# EAGLE board half-moon-earring (EAGLE 9.5.2)
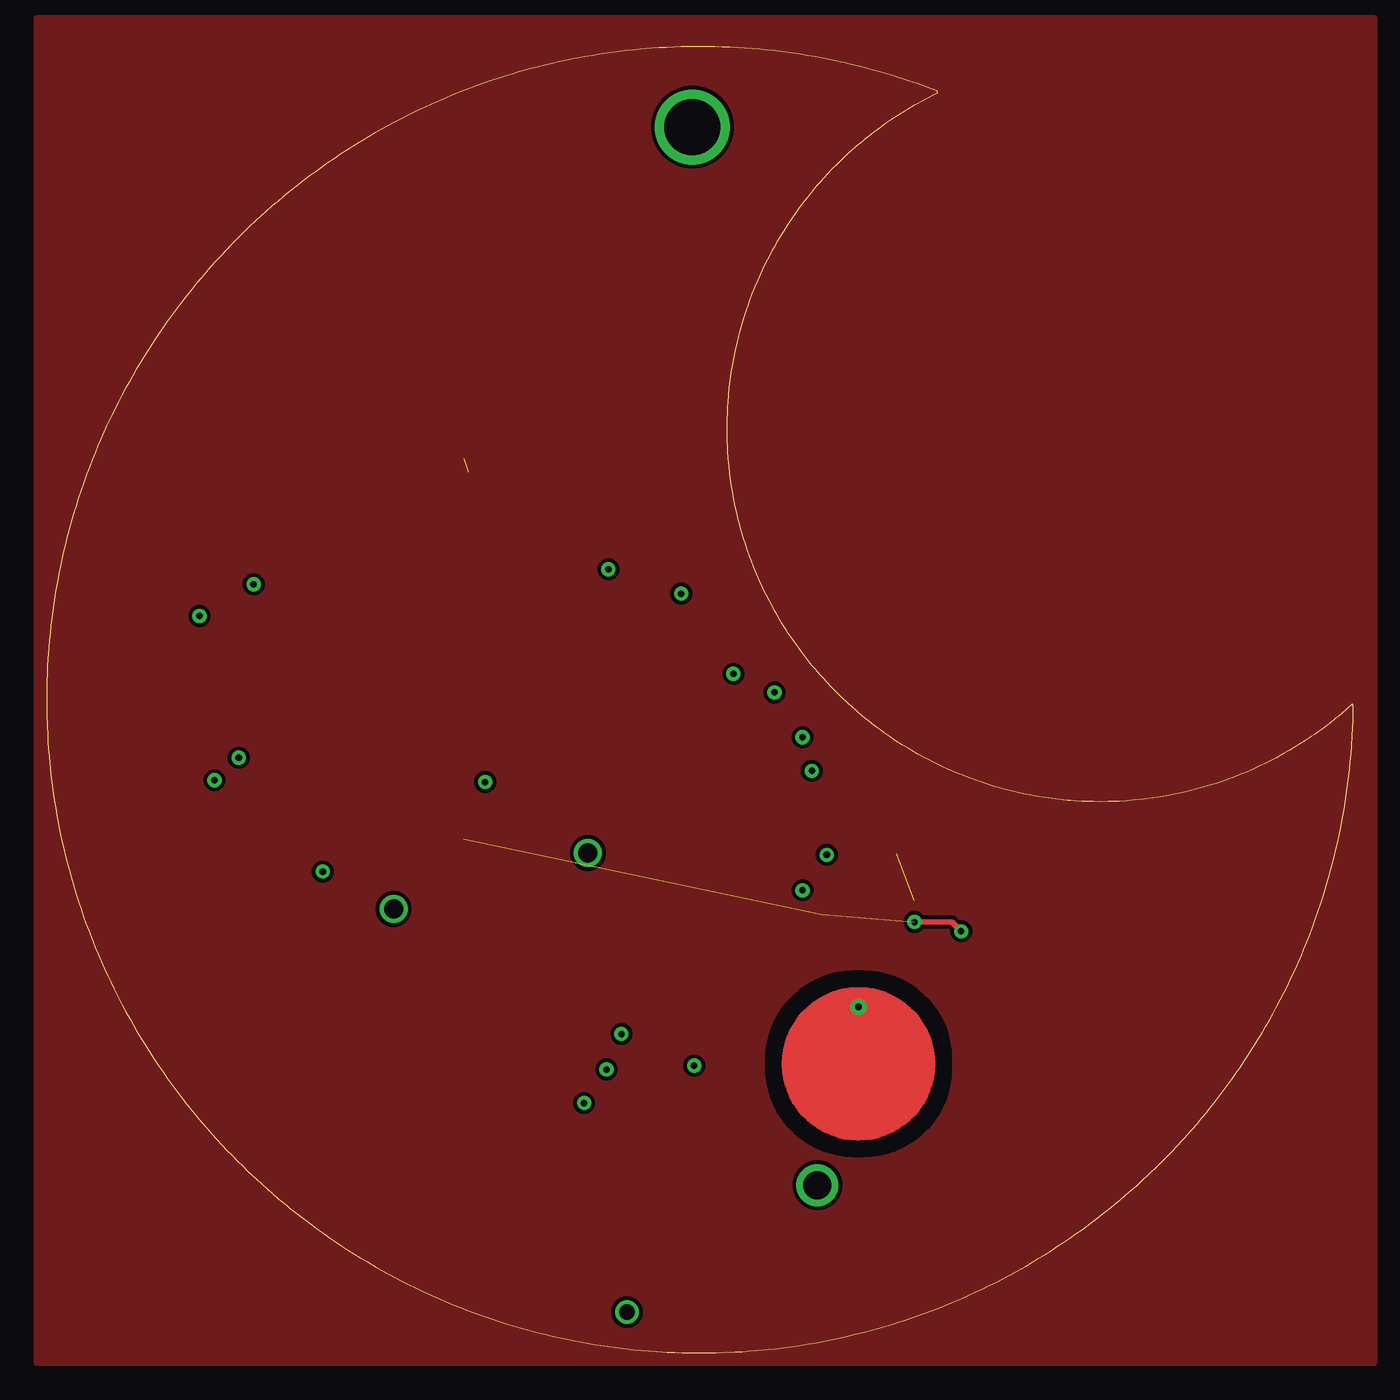
[diagram p0: board, top side]
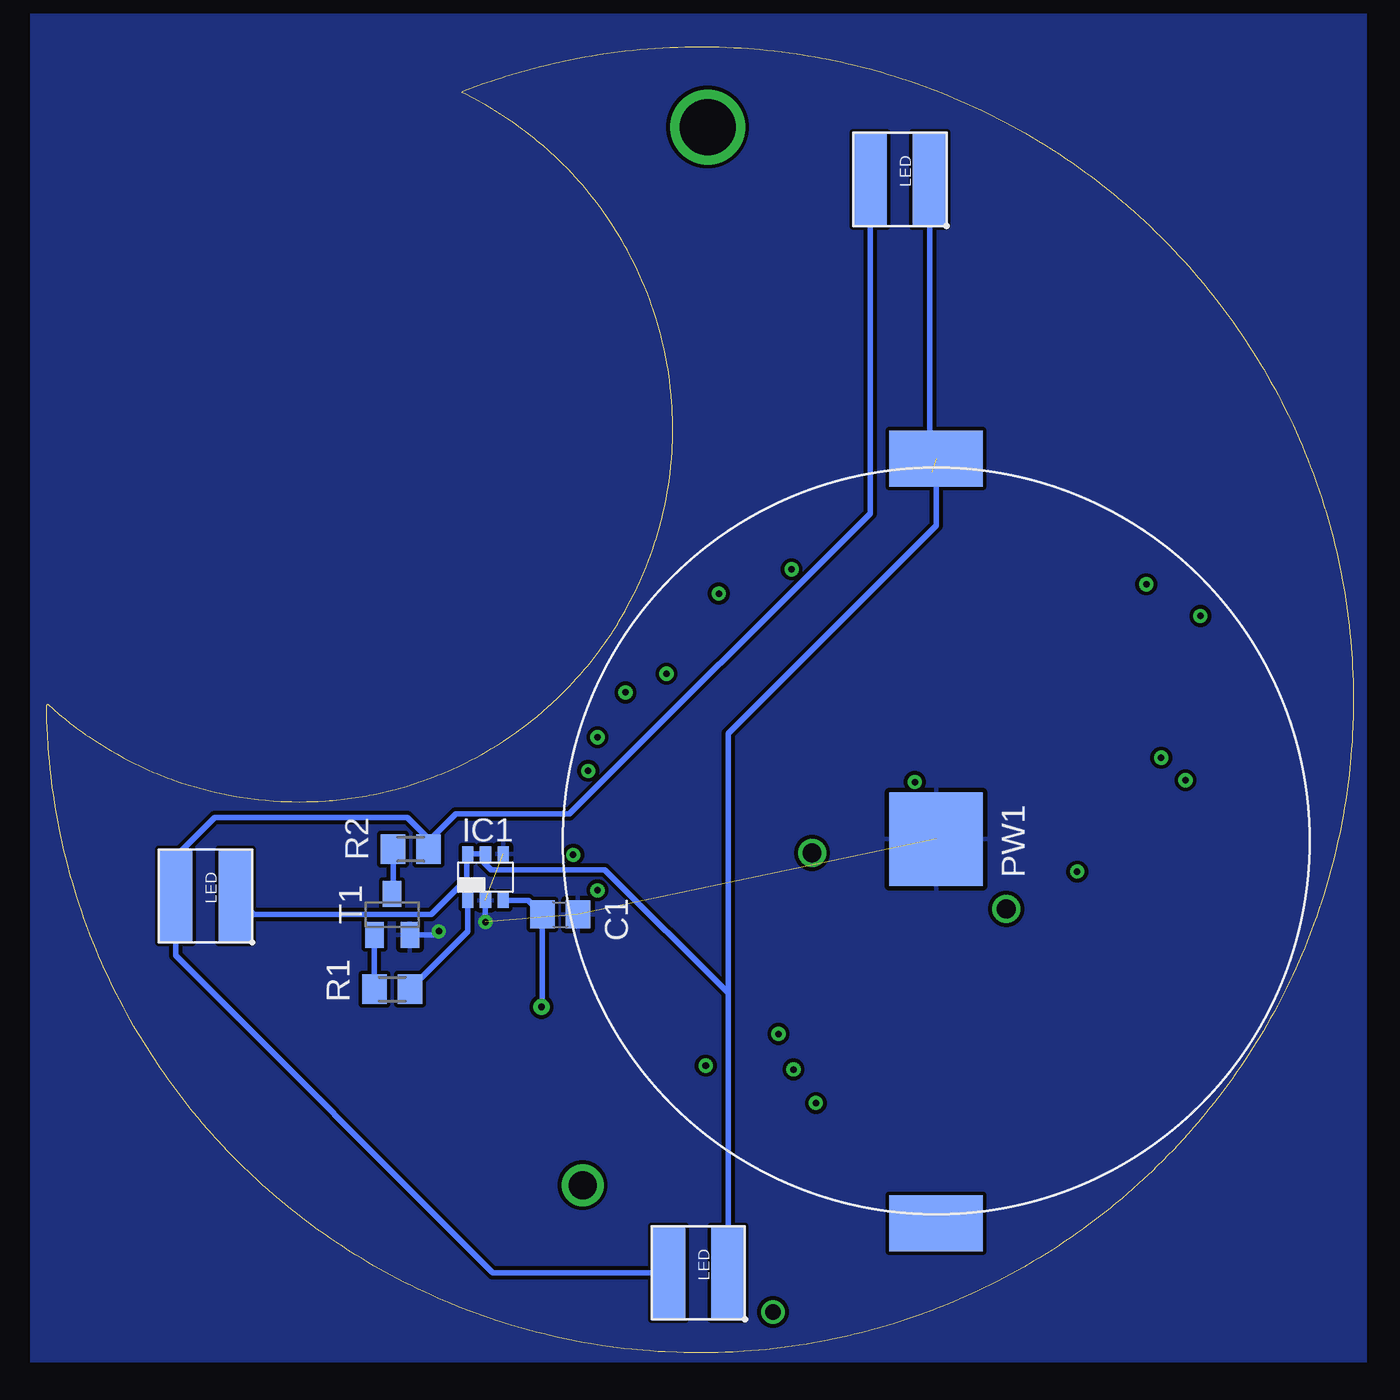
[diagram p1: board, bottom side, seen from below]

Size 70 x 70 mm. Coordinates in mm from the lower left corner, seen from the top.
Outline: 1290 segments
Copper layers (1*16): Top 0.035mm / dielectric 1.5mm / Bottom 0.035mm
Design rules "ELETROBLOCKS RULES *": minimum track width 8mil, minimum drill 0.35mm, track to track 8mil, track to pad 8mil, pad to pad 8mil, via to via 8mil, smd to smd 8mil, copper to edge 0mil, drill to drill 8mil, minimum pad ring 10mil, minimum via ring 8mil, stop-mask expansion 4mil, vias tented up to drill 0mil, thermal gap 10mil

## Footprints (pad centres in the part's own frame; a part is rotated, then mirrored left to right if it is on the bottom)
BUTTON_PASSIVE_8MM = drill 0.356: BUTTON 0,3.048
C0805 = smd 1.3 x 1.5: 1 -0.95,0; 2 0.95,0
TSOT23-6_DDC = smd 0.6 x 0.8: 1 -0.95,-1.25; 2 0,-1.25; 3 0.95,-1.25; 4 0.95,1.25; 5 0,1.25; 6 -0.95,1.25
LED5050 = smd 1.8 x 5: P$1 -1.6,0; P$2 1.6,0
CR2025 = smd 3 x 5: P$1 -20.5,0; P$2 20.5,0 | smd 5 x 5: P$3 -0.1,0
M0805 = smd 1.3 x 1.6: 1 -0.95,0; 2 0.95,0
SOT23-BEC = smd 1 x 1.4: B -0.95,-1.1; C 0,1.1; E 0.95,-1.1

## Placement (x,y rotation side)
B2  [BUTTON_PASSIVE_8MM]  43.49,15.49 0 top
C1  22pf  [C0805]  42.49,23.49 0 bottom
IC1  TTP223  [TSOT23-6_DDC]  46.49,25.49 0 bottom
LED1  LED5050  [LED5050]  61.49,24.49 180 bottom
LED2  LED5050  [LED5050]  24.29,62.89 180 bottom
LED3  LED5050  [LED5050]  35.09,4.29 180 bottom
PW1  CR2025 BATERY HOLDER  [CR2025]  22.35,27.43 270 bottom
R1  150R  [M0805]  51.49,19.49 180 bottom
R2  150R  [M0805]  50.49,26.99 0 bottom
T1  BC817  [SOT23-BEC]  51.49,23.49 0 bottom

## Library data of the parts
B2 = PatternAgents-TouchWidgets
C1 = rcl; SPICEPREFIX: C
IC1 = texas; MPN: TPS61070DDCR; OC_FARNELL: 1461062; OC_NEWARK: 64M3125
LED1-LED3 = Eletroblocks Lib
PW1 = supply1
R1 R2 = rcl; SPICEPREFIX: R
T1 = transistor

## Nets
DRIVER: IC1.1 R1.1
GND: C1.2 IC1.2 IC1.4 PW1.P$3 T1.E
LEDS: LED1.P$2 LED2.P$2 LED3.P$2 R2.2
N$2: R1.2 T1.B
N$3: R2.1 T1.C
N$11: B2.BUTTON C1.1 IC1.3
VCC: IC1.5 IC1.6 LED1.P$1 LED2.P$1 LED3.P$1 PW1.P$1

## Tracks (layer width: path | path; a pad name or v marks a point on that pad's centre or on a via)
DRIVER
  Bottom 0.305: R1.1 47.44,22.59 IC1.1
GND  (via drill 0.35)  (3 unrouted)
  Top 0.305: v48.99,22.59 48.49,23.09 v46.49,23.09
  Bottom 0.305: T1.E 49.19,22.39 v48.99,22.59 | v46.49,23.09 IC1.2
  pour Bottom: -0.71,-0.51 70.89,-0.51 70.89,71.76 -0.73,71.76
LEDS
  Bottom 0.305: LED2.P$2 25.89,44.99 41.99,28.89 48.09,28.89 49.54,27.44 R2.2 | LED3.P$2 46.09,4.29 63.09,21.29 LED1.P$2 63.09,26.59 60.99,28.69 50.69,28.69 49.54,27.54 R2.2 | R2.2 49.69,27.64
N$1  (via drill 3)
  other vias: 34.59,65.69
N$2
  Bottom 0.305: R1.2 T1.B
N$3
  Bottom 0.305: T1.C 51.44,24.64 R2.1
N$4  (via drill 0.35)
  other vias: 30.09,41.99
N$5  (via drill 0.35)
  other vias: 33.99,40.69
N$6  (via drill 0.35)
  other vias: 36.79,36.39
N$7  (via drill 0.35)
  other vias: 38.99,35.39
N$8  (via drill 0.35)
  other vias: 40.49,32.99
N$9  (via drill 0.35)
  other vias: 40.99,31.19
N$10  (via drill 0.35)
  other vias: 41.79,26.69
N$11
  Bottom 0.305: B2.BUTTON 43.44,18.59 C1.1 44.19,24.24 IC1.3
N$12  (via drill 0.35)
  other vias: 40.49,24.79
N$13  (via drill 1)
  other vias: 28.99,26.79
N$14  (via drill 0.35)
  other vias: 23.49,30.59
N$15  (via drill 1)
  other vias: 18.59,23.79
N$16  (via drill 0.35)
  other vias: 28.79,13.39
N$17  (via drill 0.35)
  other vias: 29.99,15.19
N$18  (via drill 0.35)
  other vias: 30.79,17.09
N$19  (via drill 0.35)
  other vias: 34.69,15.39
N$20  (via drill 1.5)
  other vias: 41.29,8.99
N$21  (via drill 0.85)
  other vias: 31.09,2.19
N$22  (via drill 0.35)
  other vias: 10.29,31.89
N$23  (via drill 0.35)
  other vias: 8.99,30.69
N$24  (via drill 0.35)
  other vias: 8.19,39.49
N$25  (via drill 0.35)
  other vias: 11.09,41.19
N$26  (via drill 0.35)
  other vias: 14.79,25.79
SIGNAL
  pour Top: -0.51,-0.51 -0.51,71.49 71.1,71.49 71.1,-0.51
VCC  (1 unrouted)
  Bottom 0.305: IC1.5 46.59,26.74 | 46.59,26.74 IC1.6 47.49,26.69 47.49,25.19 47.68,25 47.89,25 49.39,23.49 58.89,23.49 LED1.P$1 | LED2.P$1 22.69,47.29 22.59,47.19 | PW1.P$1 22.35,44.33 33.49,33.19 LED3.P$1 33.49,19.29 40.09,25.89 46.19,25.89 46.59,26.29 46.59,26.74